# Altium PCB SistemaMinimo-dsPIC33FJ64MC804.PcbDoc
Units mm, origin at the board's own origin, x right, y up, seen from the top; angles counter-clockwise.
Board outline 23.7 x 56.68 mm, 2 copper layers (Top Layer, Bottom Layer); 3 components, 39 nets, 88 pads, 0 vias.
Unrouted connection lines stored in the file: 5.
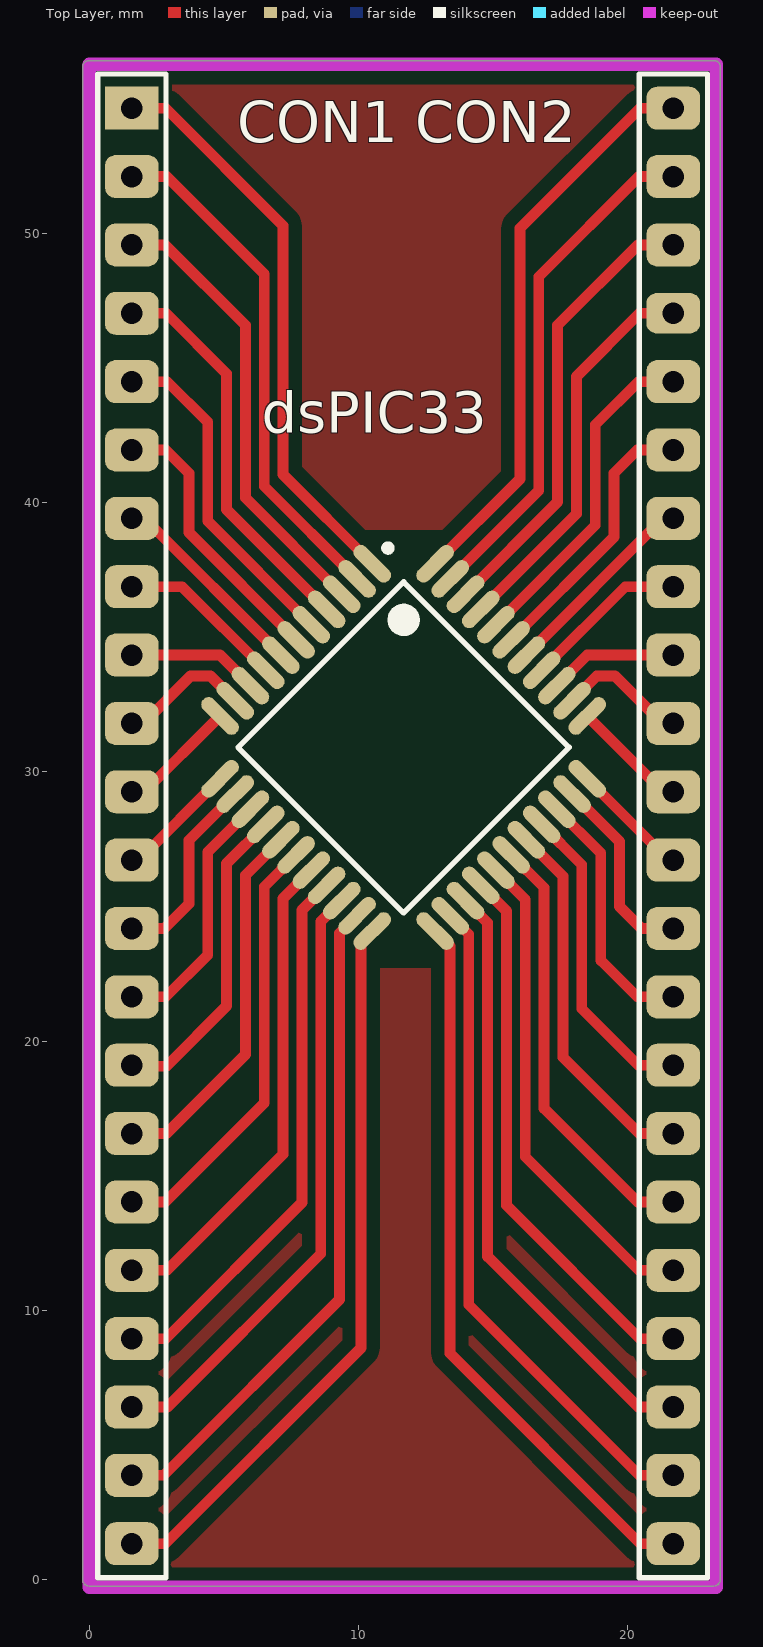
[diagram p0: Top Layer view]
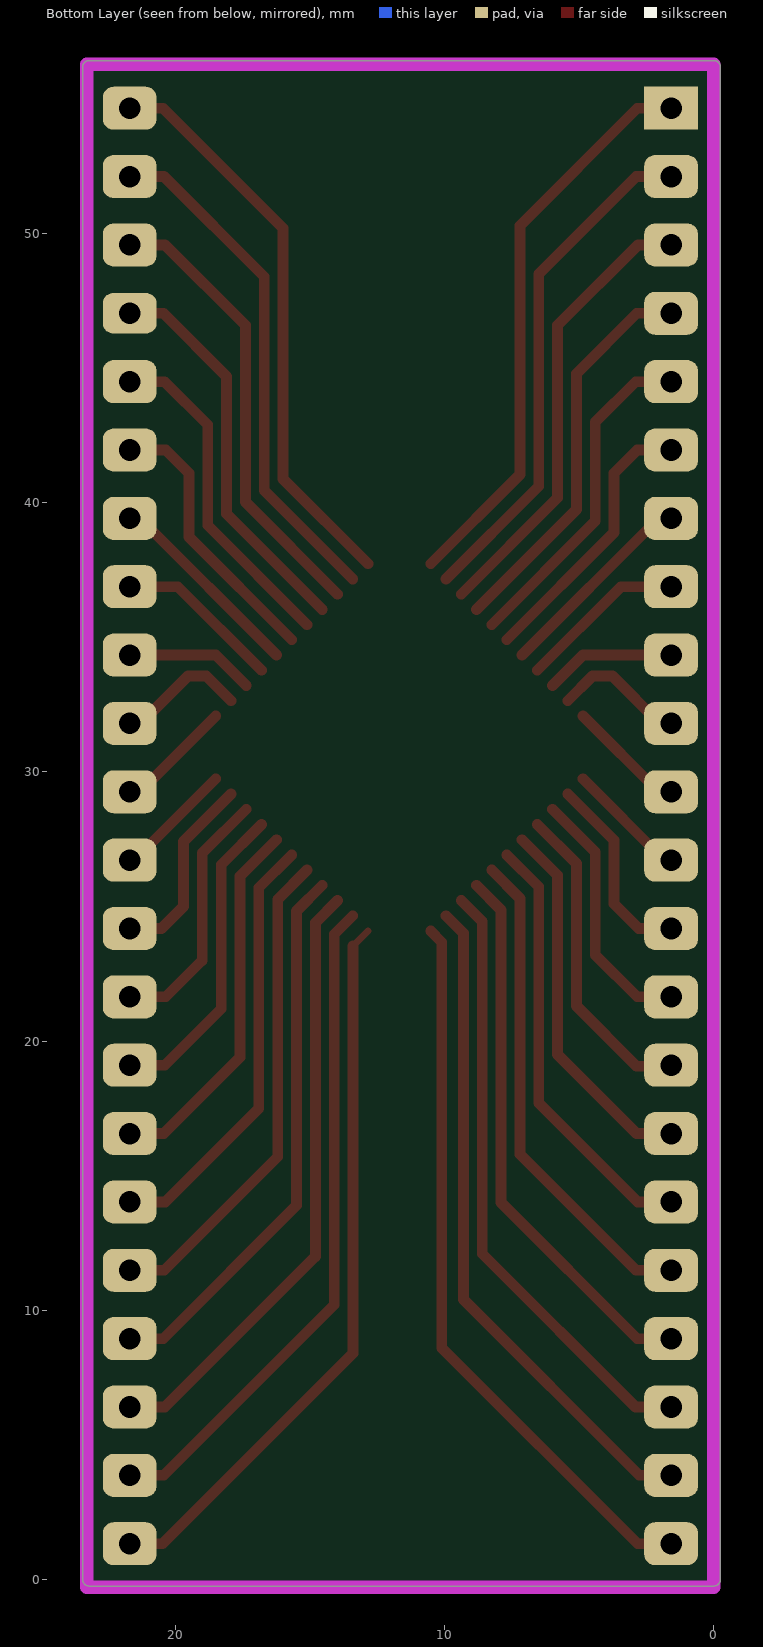
[diagram p1: Bottom Layer view, seen from below]

## Layer stack, top to bottom
Top Layer: signal copper 0.0356
Dielectric: dielectric 0.32, FR-4, Dk 4.8
Bottom Layer: signal copper 0.0356

## Board outline
-0.25,0 ccw(c0,0) 0,-0.25 23.2,-0.25 ccw(c23.2,0) 23.45,0 23.45,56.184 ccw(c23.2,56.184) 23.2,56.434 0,56.434 ccw(c0,56.184) -0.25,56.184

## Design rules (kind name [scope] priority, off if disabled: settings)
AssemblyTestPointUsage AssemblyTestPointUsage_1 [All] p2:
AssemblyTestpoint AssemblyTestpoint_1 [All] p2: testpointundercomponent=TRUE minsize=1.016 maxsize=2.54 preferedsize=1.524 minholesize=0 maxholesize=1.016 preferedholesize=0.813 testpointgrid=0.025 usegrid=TRUE gridtolerance=0 allowsidetop=TRUE allowsidebottom=TRUE
Clearance [All] p1: gap=0.25
ComponentClearance ComponentClearance_1 [All] p2: gap=0.254 collisioncheckmode=3 verticalgap=0.254 showdistances=FALSE
DiffPairsRouting DiffPairsRouting_1 [All] p2: maxlimit=0.254 minlimit=0.254 mostfreqgap=0.254 maxuncoupledlength=12.7
FabricationTestPointUsage TestPointUsage [All] p2: valid=0 allowmultiple=FALSE
FabricationTestpoint Testpoint [All] p2: side=3 testpointundercomponent=TRUE minsize=1.016 maxsize=2.54 preferedsize=1.524 minholesize=0 maxholesize=1.016 preferedholesize=0.813 testpointgrid=0.025 allowsidetop=TRUE allowsidebottom=TRUE usegrid=TRUE gridtolerance=0
FanoutControl Fanout_LCC [IsLCC] p1: bgadir=Out bgaviamode=Centered fanoutstyle=Auto fanoutdirection=Alternating viagrid=0.025 // Fanout_LCC (Default Rule)
FanoutControl Fanout_BGA [IsBGA] p2: bgadir=Out bgaviamode=Centered fanoutstyle=Auto fanoutdirection=Alternating viagrid=0.025 // Fanout_BGA (Default Rule)
FanoutControl Fanout_Default [All] p4: bgadir=Out bgaviamode=Centered fanoutstyle=Auto fanoutdirection=Alternating viagrid=0.025 // Fanout_Default (Default Rule)
FanoutControl Fanout_Small [(CompPinCount < 5)] p5: bgadir=Out bgaviamode=Centered fanoutstyle=Auto fanoutdirection=OutThenIn viagrid=0.025 // Fanout_Small (Default Rule)
FanoutControl Fanout_BGA_1 [IsBGA] p6: bgadir=Out bgaviamode=Centered fanoutstyle=Auto fanoutdirection=Alternating viagrid=0.025 // Fanout_BGA (Default Rule)
FanoutControl Fanout_LCC_1 [IsLCC] p7: bgadir=Out bgaviamode=Centered fanoutstyle=Auto fanoutdirection=Alternating viagrid=0.025 // Fanout_LCC (Default Rule)
FanoutControl Fanout_SOIC_1 [IsSOIC] p8: bgadir=Out bgaviamode=Centered fanoutstyle=Auto fanoutdirection=Alternating viagrid=0.025 // Fanout_SOIC (Default Rule)
FanoutControl Fanout_Small_1 [(CompPinCount < 5)] p9: bgadir=Out bgaviamode=Centered fanoutstyle=Auto fanoutdirection=OutThenIn viagrid=0.025 // Fanout_Small (Default Rule)
FanoutControl Fanout_Default_1 [All] p10: bgadir=Out bgaviamode=Centered fanoutstyle=Auto fanoutdirection=Alternating viagrid=0.025 // Fanout_Default (Default Rule)
Height Height_1 [All] p2: minheight=0 maxheight=25.4 prefheight=12.7
HoleSize HoleSize_1 [All] p2: absolutevalues=TRUE maxlimit=2.54 minlimit=0.025 maxpercent=80.000 minpercent=20.000
HoleToHoleClearance HoleToHoleClearance_1 [All] p2: gap=0.254 allowstackedmicrovias=TRUE
LayerPairs LayerPairs_1 [All] p2: enforce=TRUE
MinimumSolderMaskSliver MinimumSolderMaskSliver_1 [All] p2: minsoldermaskwidth=0.254
NetAntennae NetAntennae_1 [All] p2: netantennaetolerance=0
PasteMaskExpansion PasteMaskExpansion_1 [All] p2: expansion=0
PlaneClearance PlaneClearance_1 [All] p2: clearance=0.508
PolygonConnect [All] p1: connectstyle=Relief reliefconductorwidth=0.254 reliefentries=4 polygonreliefangle="90 Angle" airgapwidth=0.254
PolygonConnect PolygonConnect_1 [All] p2: connectstyle=Relief reliefconductorwidth=0.254 reliefentries=4 polygonreliefangle="90 Angle" airgapwidth=0.254
RoutingPriority RoutingPriority_1 [All] p2: routingpriority=0
RoutingTopology RoutingTopology_1 [All] p2: topology=Shortest
RoutingVias [All] p1: holewidth=0.6 width=1 viastyle="Through Hole" minholewidth=0.711 minwidth=1.27 maxholewidth=0.711 maxwidth=1.27
ShortCircuit ShortCircuit_1 [All] p2: allowed=FALSE
SilkToSilkClearance SilkToSilkClearance_1 [All] p2: silktosilkclearance=0.254
SilkToSolderMaskClearance SilkscreenOverComponentPads [IsPad] p2: minsilkscreentomaskgap=0.254 clearancetoexposedcopper=TRUE
SolderMaskExpansion [All] p1: expansion=0.102
SolderMaskExpansion SolderMaskExpansion_1 [All] p2: expansion=0.102
UnRoutedNet UnRoutedNet_1 [All] p2:
Width [All] p1: maxlimit=5 minlimit=0.25 preferedwidth=0.3 minimp=50.000000 maximp=50.000000 favimp=50.000000
24 further rules are at their usual default settings.

## Components (designator, comment, footprint, x,y, rotation, side; value= is the part's Value field where it differs from the comment)
CON1 "Header 22" HDR1X22#1 1.58,54.664 r270 top
CON2 "Header 22" HDR1X22#2 21.7,1.324 r90 top
dsPIC33 "DSPIC33FJ64MC804-I/PT" TQFP-PT44_N 11.68,30.914 r315 top

## Footprints (in the part's own frame and the unit in brackets; to place one, negate y for a bottom-side part, rotate by r counter-clockwise, add the part's x,y. Pads: shape width x height; smd on the part's side, far side on the other; paste and mask are expansions set on the pad)
HDR1X22#1 [mm] "Connector; Header; 22 Position"
  rect 1.6x2 hole 0.8: 1(0,0)
  rrect50% 1.6x2 hole 0.8: 2(2.54,0) 3(5.08,0) 4(7.62,0) 5(10.16,0) 6(12.7,0) 7(15.24,0) 8(17.78,0) 9(20.32,0) 10(22.86,0) 11(25.4,0) 12(27.94,0) 13(30.48,0) 14(33.02,0) 15(35.56,0) 16(38.1,0) 17(40.64,0) 18(43.18,0) 19(45.72,0) 20(48.26,0) 21(50.8,0) 22(53.34,0)
  silkscreen extent -1.27,-1.27 54.61,1.27
HDR1X22#2 [mm] "Connector; Header; 22 Position"
  rrect50% 1.6x2 hole 0.8: 1(0,0) 2(2.54,0) 3(5.08,0) 4(7.62,0) 5(10.16,0) 6(12.7,0) 7(15.24,0) 8(17.78,0) 9(20.32,0) 10(22.86,0) 11(25.4,0) 12(27.94,0) 13(30.48,0) 14(33.02,0) 15(35.56,0) 16(38.1,0) 17(40.64,0) 18(43.18,0) 20(48.26,0) 21(50.8,0) 22(53.34,0)
  rrect50% 1.5x2 hole 0.8: 19(45.72,0)
  silkscreen extent -1.27,-1.27 54.61,1.27
TQFP-PT44_N [mm] "Thin QFP, 44-Leads, Body 10x10mm, Pitch 0.8mm, IPC Medium Density"
  oval 1.75x0.55 smd: 1(-5.65,4) 2(-5.65,3.2) 3(-5.65,2.4) 4(-5.65,1.6) 5(-5.65,0.8) 6(-5.65,0) 7(-5.65,-0.8) 8(-5.65,-1.6) 9(-5.65,-2.4) 10(-5.65,-3.2) 11(-5.65,-4) 23(5.65,-4) 24(5.65,-3.2) 25(5.65,-2.4) 26(5.65,-1.6) 27(5.65,-0.8) 28(5.65,0) 29(5.65,0.8) 30(5.65,1.6) 31(5.65,2.4) 32(5.65,3.2) 33(5.65,4)
  oval 0.55x1.75 smd: 12(-4,-5.65) 13(-3.2,-5.65) 14(-2.4,-5.65) 15(-1.6,-5.65) 16(-0.8,-5.65) 17(0,-5.65) 18(0.8,-5.65) 19(1.6,-5.65) 20(2.4,-5.65) 21(3.2,-5.65) 22(4,-5.65) 34(4,5.65) 35(3.2,5.65) 36(2.4,5.65) 37(1.6,5.65) 38(0.8,5.65) 39(0,5.65) 40(-0.8,5.65) 41(-1.6,5.65) 42(-2.4,5.65) 43(-3.2,5.65) 44(-4,5.65)
  silkscreen extent -5.77,-4.35 4.35,4.95, body extent -5,-5 5,5, height 1.2

## Part data
CON1 CON2: "Header, 22-Pin"
dsPIC33: "High-Performance 16-bit Digital Signal Controller, 64 KB Flash, 16 KB RAM, 44-Pin TQFP, Industrial Temperature"

## Nets (pads, with @x,y where several pads share a name; then routed paths per layer and width w, separated by ;. In a path a pad name is that pad's centre, name@x,y a point inside that pad or via, vN(x,y) a via of type N, cw(c..) or ccw(c..) an arc to the next point about the centre after c; other vN are vias at no path point)
NetCON1_1: CON1.1 dsPIC33.1 | length 21.4
  Top Layer w0.4: CON1.1 2.836,54.664 7.2,50.3 7.2,41.051 dsPIC33.1
NetCON1_2: CON1.2 dsPIC33.2 | length 19.2
  Top Layer w0.4: CON1.2 2.876,52.124 6.5,48.5 6.5,40.62 dsPIC33.2
NetCON1_3: CON1.3 dsPIC33.3 | length 16.9
  Top Layer w0.4: CON1.3 2.816,49.584 5.8,46.6 5.8,40.188 dsPIC33.3
NetCON1_4: CON1.4 dsPIC33.4 | length 14.7
  Top Layer w0.4: CON1.4 2.856,47.044 5.1,44.8 5.1,39.757 dsPIC33.4
NetCON1_5: CON1.5 dsPIC33.5 | length 12.6
  Top Layer w0.4: CON1.5 2.896,44.504 4.4,43 4.4,39.325 dsPIC33.5
NetCON1_6: CON1.6 CON1.16 CON2.7 CON2.17 dsPIC33.6 dsPIC33.16 dsPIC33.29 dsPIC33.39 | length 48.5
  Top Layer w0.4: CON1.16 2.864,16.564 5.8,19.5 5.8,26.165 dsPIC33.16 ; CON1.6 2.836,41.964 3.7,41.1 3.7,38.894 dsPIC33.6 ; dsPIC33.39 19.5,38.734 19.5,41.1 20.364,41.964 CON2.17 ; dsPIC33.29 17.6,26.125 17.6,19.4 20.436,16.564 CON2.7
NetCON1_7: CON1.7 dsPIC33.7 | length 7.6
  Top Layer w0.254: CON1.7 CON1.7@2.039,39.424
  Top Layer w0.4: CON1.7@2.039,39.424 dsPIC33.7
NetCON1_8: CON1.8 dsPIC33.8 | length 6.3
  Top Layer w0.4: CON1.8 3.447,36.884 dsPIC33.8
NetCON1_9: CON1.9 dsPIC33.9 | length 4.9
  Top Layer w0.4: CON1.9 4.856,34.344 dsPIC33.9
NetCON1_10: CON1.10 dsPIC33.10 | length 5
  Top Layer w0.254: CON1.10 CON1.10@2.004,31.804
  Top Layer w0.4: CON1.10@2.004,31.804 3.764,33.564 4.505,33.564 dsPIC33.10
NetCON1_11: CON1.11 dsPIC33.11 | length 4.4
  Top Layer w0.254: CON1.11@1.63,29.214 CON1.11@1.99,29.214
  Top Layer w0.4: CON1.11@1.99,29.214 dsPIC33.11
NetCON1_12: CON1.12 dsPIC33.12 | length 4.5
  Top Layer w0.254: CON1.12 CON1.12@1.833,26.724
  Top Layer w0.4: CON1.12@1.833,26.724 dsPIC33.12
NetCON1_13: CON1.13 dsPIC33.13 | length 7.3
  Top Layer w0.4: CON1.13 2.784,24.184 3.7,25.1 3.7,27.46 dsPIC33.13
NetCON1_14: CON1.14 dsPIC33.14 | length 9.5
  Top Layer w0.4: CON1.14 2.844,21.644 4.4,23.2 4.4,27.028 dsPIC33.14
NetCON1_15: CON1.15 dsPIC33.15 | length 11.8
  Top Layer w0.4: CON1.15@1.58,19.064 2.864,19.064 5.1,21.3 5.1,26.597 dsPIC33.15
NetCON1_17: CON1.17 CON2.6 CON2.18 dsPIC33.17 dsPIC33.28 dsPIC33.40 | length 44.8
  Top Layer w0.4: CON1.17 2.824,14.024 6.5,17.7 6.5,25.734 dsPIC33.17 ; dsPIC33.40 18.8,39.165 18.8,42.9 20.404,44.504 CON2.18 ; dsPIC33.28 16.9,25.694 16.9,17.5 20.376,14.024 CON2.6
NetCON1_18: CON1.18 dsPIC33.18 | length 18.4
  Top Layer w0.4: CON1.18 2.884,11.484 7.2,15.8 7.2,25.303 dsPIC33.18
NetCON1_19: CON1.19 dsPIC33.19 | length 20.6
  Top Layer w0.4: CON1.19 2.844,8.944 7.9,14 7.9,24.871 dsPIC33.19
NetCON1_20: CON1.20 dsPIC33.20 | length 22.8
  Top Layer w0.4: CON1.20 2.904,6.404 8.6,12.1 8.6,24.44 dsPIC33.20
NetCON1_21: CON1.21 dsPIC33.21 | length 25
  Top Layer w0.4: CON1.21 2.764,3.864 9.3,10.4 9.3,24.009 dsPIC33.21
NetCON1_22: CON1.22 dsPIC33.22 | length 27.2
  Top Layer w0.4: CON1.22 2.824,1.324 10.1,8.6 10.1,23.677 dsPIC33.22
NetCON2_1: CON2.1 dsPIC33.23 | length 27.2
  Top Layer w0.254: dsPIC33.23 dsPIC33.23@13.4,23.537
  Top Layer w0.4: dsPIC33.23@13.4,23.537 13.4,8.4 20.476,1.324 CON2.1
NetCON2_2: CON2.2 dsPIC33.24 | length 25
  Top Layer w0.4: dsPIC33.24 14.1,23.969 14.1,10.2 20.436,3.864 CON2.2
NetCON2_3: CON2.3 dsPIC33.25 | length 22.8
  Top Layer w0.4: dsPIC33.25 14.8,24.4 14.8,12 14.9,11.9 20.396,6.404 CON2.3
NetCON2_4: CON2.4 dsPIC33.26 | length 20.5
  Top Layer w0.4: dsPIC33.26 15.5,24.831 15.5,13.9 20.456,8.944 CON2.4
NetCON2_5: CON2.5 dsPIC33.27 | length 18.4
  Top Layer w0.4: dsPIC33.27 16.2,25.263 16.2,15.7 20.416,11.484 CON2.5
NetCON2_8: CON2.8 dsPIC33.30 | length 11.7
  Top Layer w0.4: dsPIC33.30 18.3,26.557 18.3,21.2 20.396,19.104 CON2.8
NetCON2_9: CON2.9 dsPIC33.31 | length 9.6
  Top Layer w0.4: dsPIC33.31 19,26.988 19,23 20.356,21.644 CON2.9
NetCON2_10: CON2.10 dsPIC33.32 | length 7.2
  Top Layer w0.4: dsPIC33.32 19.7,27.42 19.7,25 20.516,24.184 CON2.10
NetCON2_11: CON2.11 dsPIC33.33 | length 4.4
  Top Layer w0.254: CON2.11@21.527,26.724 CON2.11
  Top Layer w0.4: dsPIC33.33 CON2.11@21.527,26.724
NetCON2_12: CON2.12 dsPIC33.34 | length 4.4
  Top Layer w0.254: CON2.12@21.32,29.264 CON2.12
  Top Layer w0.4: dsPIC33.34 CON2.12@21.32,29.264
NetCON2_13: CON2.13 dsPIC33.35 | length 4.9
  Top Layer w0.254: CON2.13@21.296,31.804 CON2.13
  Top Layer w0.4: dsPIC33.35 18.855,33.564 19.536,33.564 CON2.13@21.296,31.804
NetCON2_14: CON2.14 dsPIC33.36 | length 4.8
  Top Layer w0.4: dsPIC33.36 18.504,34.344 CON2.14
NetCON2_15: CON2.15 dsPIC33.37 | length 6.2
  Top Layer w0.4: dsPIC33.37 19.913,36.884 CON2.15
NetCON2_16: CON2.16 dsPIC33.38 | length 7.6
  Top Layer w0.254: CON2.16@21.321,39.424 CON2.16
  Top Layer w0.4: dsPIC33.38 CON2.16@21.321,39.424
NetCON2_19: CON2.19 dsPIC33.41 | length 14.7
  Top Layer w0.4: dsPIC33.41 18.1,39.597 18.1,44.7 20.444,47.044 CON2.19
NetCON2_20: CON2.20 dsPIC33.42 | length 16.9
  Top Layer w0.4: dsPIC33.42 17.4,40.028 17.4,46.6 20.384,49.584 CON2.20
NetCON2_21: CON2.21 dsPIC33.43 | length 19.1
  Top Layer w0.4: dsPIC33.43 16.7,40.46 16.7,48.4 20.424,52.124 CON2.21
NetCON2_22: CON2.22 dsPIC33.44 | length 21.3
  Top Layer w0.4: dsPIC33.44 16,40.891 16,50.2 20.464,54.664 CON2.22

## Polygon pours and split planes (outlines as drawn)
no net on Top Layer "Bottom Layer-No Net" (solid, pour order 10): 0,22.7 23.3,22.7 23.3,-0.3 0,-0.3
no net on Top Layer "Bottom Layer-No Net" (solid, pour order 8): 23.3,39 0,39 0,56.3 23.3,56.3

## Keep-outs
Keep-Out Layer:
  lines w0.5: 0,-0.3 23.3,-0.3 23.3,56.3 0,56.3 0,-0.3